# EAGLE board Device_Measurement_V1.2 (EAGLE 6.5.0)
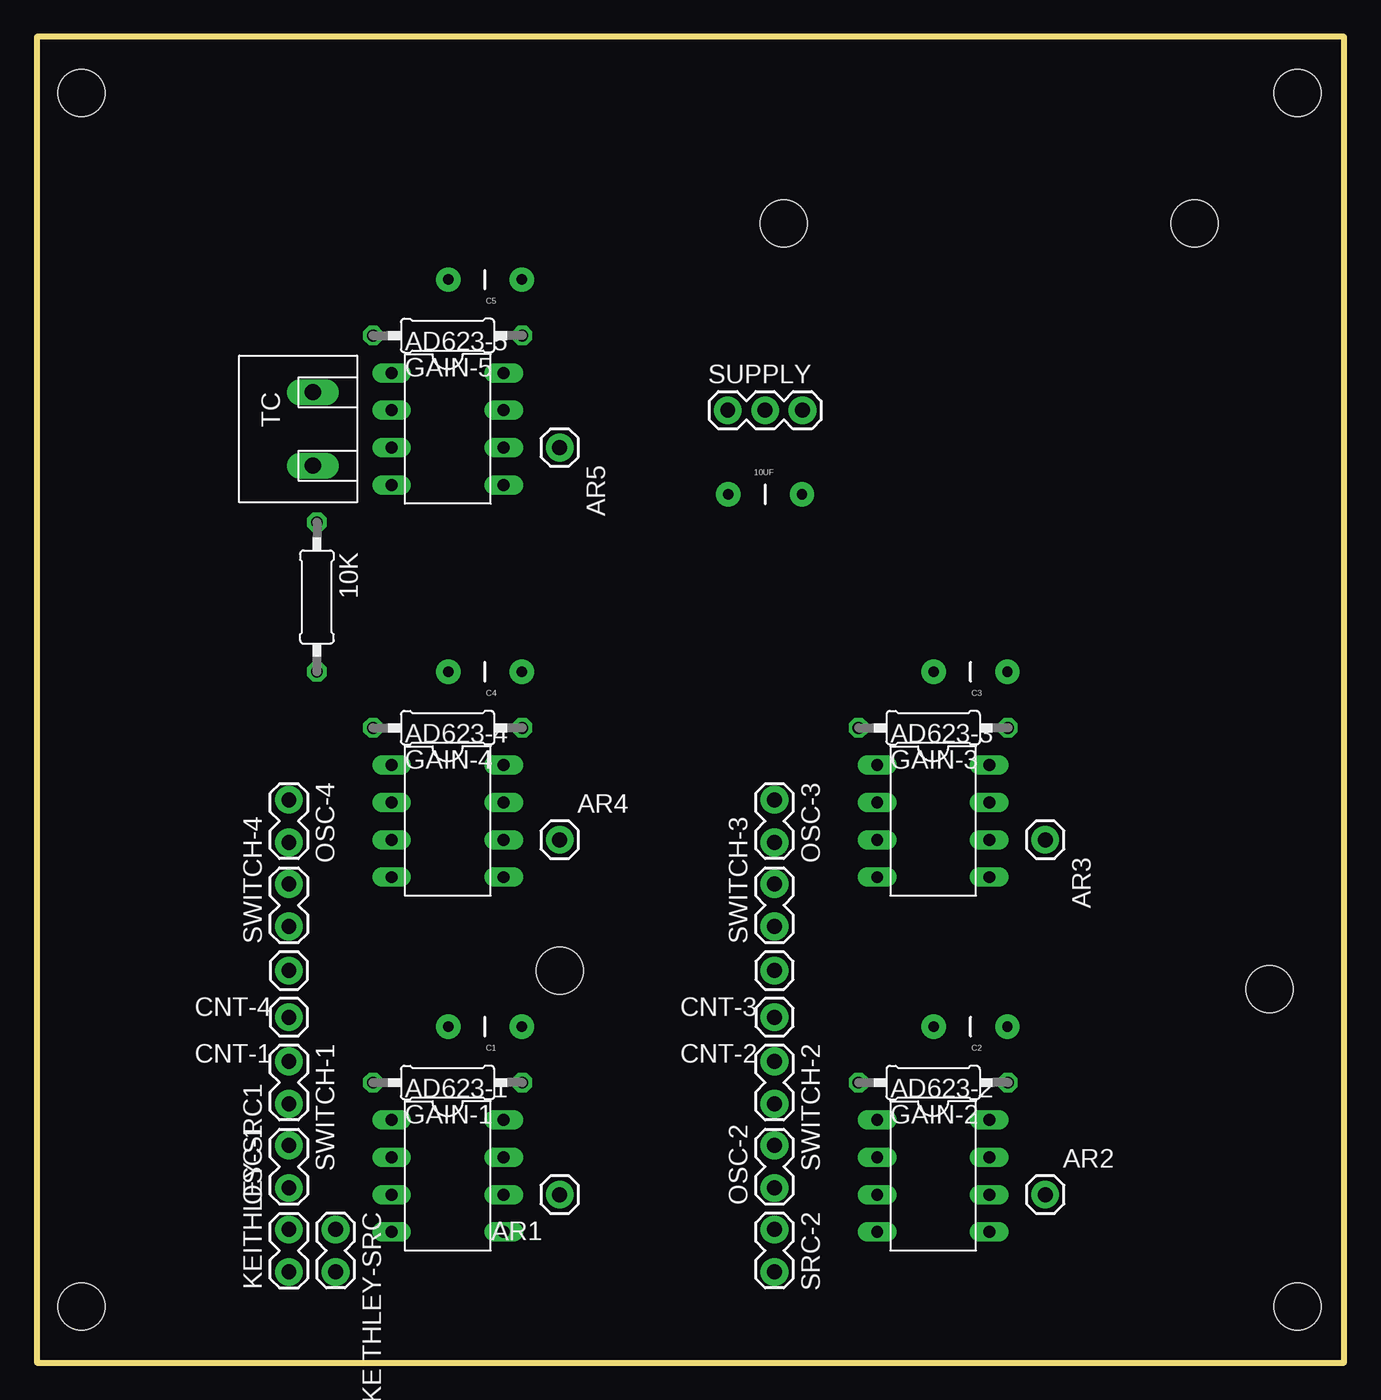
[diagram p0: board, top side]
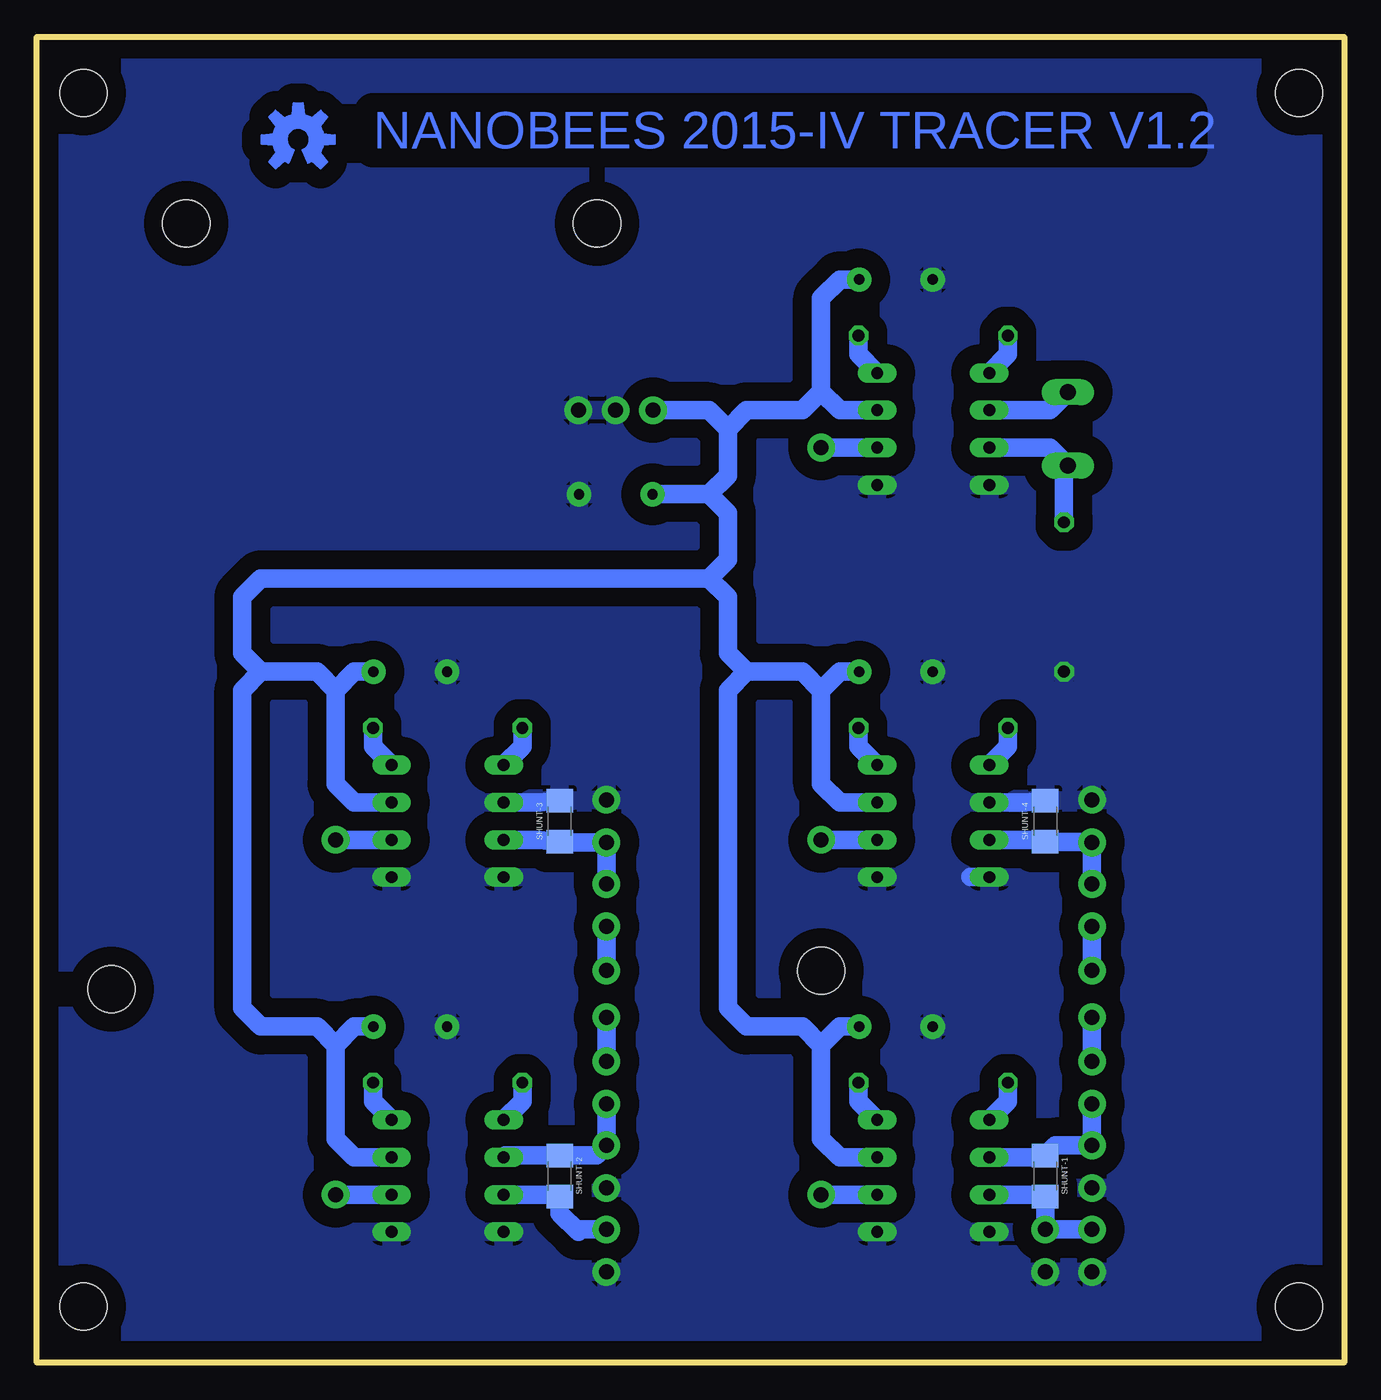
[diagram p1: board, bottom side, seen from below]

Size 88.9 x 90.17 mm. Coordinates in mm from the lower left corner, seen from the top.
Outline: 0,0 88.9,0 88.9,90.17 0,90.17 0,0
Copper layers (1*16): Top 0.035mm / dielectric 1.5mm / Bottom 0.035mm
Design rules "default": minimum track width 10mil, minimum drill 24mil, track to track 8mil, track to pad 8mil, pad to pad 8mil, via to via 8mil, smd to smd 8mil, copper to edge 40mil, drill to drill 8mil, minimum pad ring 10mil, minimum via ring 8mil, stop-mask expansion 4mil, vias tented up to drill 0mil, thermal gap 10mil
Holes 3.2 mm at 3.05,86.36 85.72,86.36 3.05,3.81 85.72,3.81 50.8,77.47 78.74,77.47 83.82,25.4 35.56,26.67

## Footprints (pad centres in the part's own frame; a part is rotated, then mirrored left to right if it is on the bottom)
0207/10 = drill 0.813 octagon: 1 -5.08,0; 2 5.08,0
CAP-PTH-5MM = drill 0.7 pad 1.651: 1 -2.5,0; 2 2.5,0
DIL08 = drill 0.813 long: 1 -3.81,-3.81; 2 -1.27,-3.81; 3 1.27,-3.81; 4 3.81,-3.81; 5 3.81,3.81; 6 1.27,3.81; 7 -1.27,3.81; 8 -3.81,3.81
1X01 = drill 1.016 pad 1.88: 1 0,0
1X02_LOCK = drill 1.016 pad 1.88: 1 -0.178,0; 2 2.718,0
1206 = smd 1.6 x 1.8: 1 -1.4,0; 2 1.4,0
1X03 = drill 1.016 pad 1.88: 1 0,0; 2 2.54,0; 3 5.08,0
M02-NANOBEES = drill 1.1 pad 1.778 long: 1 -2.5,1; 2 2.5,1

## Placement (x,y rotation side)
10K  [0207/10]  19.05,52.07 270 top
10UF  [CAP-PTH-5MM]  49.53,59.05 0 top
AD623-1  AD623N  [DIL08]  27.94,12.7 270 top
AD623-2  AD623N  [DIL08]  60.96,12.7 270 top
AD623-3  AD623N  [DIL08]  60.96,36.83 270 top
AD623-4  AD623N  [DIL08]  27.94,36.83 270 top
AD623-5  AD623N  [DIL08]  27.94,63.5 270 top
AR1  M01PTH  [1X01]  35.56,11.43 180 top
AR2  M01PTH  [1X01]  68.58,11.43 0 top
AR3  M01PTH  [1X01]  68.58,35.56 270 top
AR4  M01PTH  [1X01]  35.56,35.56 0 top
AR5  M01PTH  [1X01]  35.56,62.23 270 top
C1  [CAP-PTH-5MM]  30.48,22.86 180 top
C2  [CAP-PTH-5MM]  63.5,22.86 180 top
C3  [CAP-PTH-5MM]  63.5,46.99 180 top
C4  [CAP-PTH-5MM]  30.48,46.99 180 top
C5  [CAP-PTH-5MM]  30.48,73.66 180 top
CNT-1  M01PTH  [1X01]  17.14,23.5 180 top
CNT-2  M01PTH  [1X01]  50.16,23.5 180 top
CNT-3  M01PTH  [1X01]  50.16,26.67 180 top
CNT-4  M01PTH  [1X01]  17.14,26.67 180 top
GAIN-1  [0207/10]  27.94,19.05 180 top
GAIN-2  [0207/10]  60.96,19.05 180 top
GAIN-3  [0207/10]  60.96,43.18 180 top
GAIN-4  [0207/10]  27.94,43.18 180 top
GAIN-5  [0207/10]  27.94,69.85 180 top
KEITHLEY-SRC  M02LOCK  [1X02_LOCK]  20.32,8.89 270 top
KEITHLEY-SRC1  M02LOCK  [1X02_LOCK]  17.14,6.35 90 top
LOGO1  OSHW-LOGOM  [OSHW-LOGO-M]  71.12,83.19 0 top
OSC-1  M02LOCK  [1X02_LOCK]  17.14,12.06 90 top
OSC-2  M02LOCK  [1X02_LOCK]  50.16,12.06 90 top
OSC-3  M02LOCK  [1X02_LOCK]  50.16,38.1 270 top
OSC-4  M02LOCK  [1X02_LOCK]  17.14,38.1 270 top
SHUNT-1  [1206]  20.32,12.7 270 bottom
SHUNT-2  [1206]  53.34,12.7 270 bottom
SHUNT-3  [1206]  53.34,36.83 90 bottom
SHUNT-4  [1206]  20.32,36.83 90 bottom
SRC-2  M02LOCK  [1X02_LOCK]  50.16,8.89 270 top
SUPPLY  [1X03]  46.99,64.77 0 top
SWITCH-1  M02LOCK  [1X02_LOCK]  17.14,20.32 270 top
SWITCH-2  M02LOCK  [1X02_LOCK]  50.16,20.32 270 top
SWITCH-3  M02LOCK  [1X02_LOCK]  50.16,29.84 90 top
SWITCH-4  M02LOCK  [1X02_LOCK]  17.14,29.84 90 top
TC  M02-NANOBEES  [M02-NANOBEES]  17.78,63.5 270 top

## Library data of the parts
10K GAIN-1-GAIN-5 = resistor
10UF C1-C5 = SparkFun-Capacitors
AD623-1-AD623-5 = analog-devices; MF: ALTERA CORPORATION; MPN: AD623ANZ; OC_FARNELL: 9603700; OC_NEWARK: 59K4402
AR1-AR5 CNT-1-CNT-4 KEITHLEY-SRC KEITHLEY-SRC1 OSC-1-OSC-4 SRC-2 SUPPLY SWITCH-1-SWITCH-4 TC = SparkFun-Connectors
LOGO1 = SparkFun-Aesthetics
SHUNT-1-SHUNT-4 = SparkFun-Resistors

## Nets
5V: 10UF.1 AD623-1.7 AD623-2.7 AD623-3.7 AD623-4.7 AD623-5.7 C1.1 C2.1 C3.1 C4.1 C5.1 SUPPLY.1
GND: 10K.2 10UF.2 AD623-1.4 AD623-1.5 AD623-2.4 AD623-2.5 AD623-3.2 AD623-3.4 AD623-3.5 AD623-4.2 AD623-4.4 AD623-4.5 AD623-5.4 AD623-5.5 C1.2 C2.2 C3.2 C4.2 C5.2 KEITHLEY-SRC1.1 KEITHLEY-SRC.2 OSC-1.1 OSC-2.1 OSC-3.1 OSC-4.1 SHUNT-3.2 SHUNT-4.2 SRC-2.2 SUPPLY.2 SUPPLY.3
N$1: AD623-1.6 AR1.1
N$2: CNT-1.1 SWITCH-1.1
N$3: AD623-2.6 AR2.1
N$4: AD623-1.1 GAIN-1.2
N$5: AD623-4.6 AR4.1
N$6: AD623-1.8 GAIN-1.1
N$7: AD623-3.6 AR3.1
N$8: AD623-2.2 OSC-2.2 SHUNT-2.1 SWITCH-2.2
N$9: AD623-5.6 AR5.1
N$10: AD623-4.3 OSC-4.2 SHUNT-4.1 SWITCH-4.2
N$11: AD623-2.3 SHUNT-2.2 SRC-2.1
N$12: CNT-2.1 SWITCH-2.1
N$13: AD623-2.1 GAIN-2.2
N$14: AD623-2.8 GAIN-2.1
N$15: AD623-3.3 OSC-3.2 SHUNT-3.1 SWITCH-3.2
N$17: 10K.1 AD623-5.3 TC.2
N$18: CNT-4.1 SWITCH-4.1
N$19: CNT-3.1 SWITCH-3.1
N$20: AD623-3.1 GAIN-3.2
N$21: AD623-3.8 GAIN-3.1
N$22: AD623-4.1 GAIN-4.2
N$23: AD623-4.8 GAIN-4.1
N$24: AD623-5.2 TC.1
N$25: AD623-5.1 GAIN-5.2
N$26: AD623-5.8 GAIN-5.1
N$27: AD623-1.2 OSC-1.2 SHUNT-1.1 SWITCH-1.2
N$30: AD623-1.3 KEITHLEY-SRC1.2 KEITHLEY-SRC.1 SHUNT-1.2

## Tracks (layer width: path | path; a pad name or v marks a point on that pad's centre or on a via)
5V
  Bottom 1.27: C1.1 34.29,22.86 35.56,21.59 | 35.56,21.59 35.56,15.24 34.29,13.97 AD623-1.7 | C2.1 67.31,22.86 68.58,21.59 | 68.58,21.59 68.58,15.24 67.31,13.97 AD623-2.7 | C3.1 67.31,46.99 68.58,45.72 | 68.58,45.72 68.58,39.37 67.31,38.1 AD623-3.7 | AD623-4.7 34.29,38.1 35.56,39.37 35.56,45.72 | 35.56,45.72 34.29,46.99 C4.1 | AD623-5.7 34.29,64.77 35.56,66.04 | 35.56,66.04 35.56,72.39 34.29,73.66 C5.1 | 35.56,21.59 36.83,22.86 40.64,22.86 41.91,24.13 41.91,45.72 40.64,46.99 | 40.64,46.99 41.91,48.26 41.91,52.07 43.18,53.34 | 41.91,63.5 40.64,64.77 36.83,64.77 35.56,66.04 | 40.64,46.99 36.83,46.99 35.56,45.72 | 41.91,63.5 43.18,64.77 SUPPLY.1 | 68.58,21.59 69.85,22.86 73.66,22.86 74.93,24.13 74.93,45.72 73.66,46.99 | 73.66,46.99 69.85,46.99 68.58,45.72 | 43.18,53.34 41.91,54.61 41.91,57.78 43.18,59.05 | 43.18,53.34 73.66,53.34 74.93,52.07 74.93,48.26 73.66,46.99 | 41.91,63.5 41.91,60.33 43.18,59.05 | 43.18,59.05 10UF.1
GND
  Bottom 1.27: AD623-3.2 54.74,38.1 SHUNT-3.2 | AD623-4.2 21.72,38.1 SHUNT-4.2 | AD623-4.4 25.4,33.02
  pour Bottom (isolate 1.27): 0,90.17 0,0 88.9,0 88.9,90.17
N$1
  Bottom 1.27: AD623-1.6 AR1.1
N$2
  Bottom 1.27: SWITCH-1.1 CNT-1.1
N$3
  Bottom 1.27: AD623-2.6 AR2.1
N$4
  Bottom 1.27: GAIN-1.2 22.86,17.78 AD623-1.1
N$5
  Bottom 1.27: AD623-4.6 AR4.1
N$6
  Bottom 1.27: GAIN-1.1 33.02,17.78 AD623-1.8
N$7
  Bottom 1.27: AD623-3.6 AR3.1
N$8
  Bottom 1.27: AD623-2.2 57.02,14.1 SHUNT-2.1 50.85,14.1 OSC-2.2 SWITCH-2.2
N$9
  Bottom 1.27: AD623-5.6 AR5.1
N$10
  Bottom 1.27: SWITCH-4.2 OSC-4.2 17.19,35.43 SHUNT-4.1 20.45,35.56 AD623-4.3
N$11
  Bottom 1.27: AD623-2.3 53.47,11.43 SHUNT-2.2 53.34,10.16 52.07,8.89 51.89,9.07 SRC-2.1
N$12
  Bottom 1.27: SWITCH-2.1 CNT-2.1
N$13
  Bottom 1.27: GAIN-2.2 55.88,17.78 AD623-2.1
N$14
  Bottom 1.27: GAIN-2.1 66.04,17.78 AD623-2.8
N$15
  Bottom 1.27: AD623-3.3 54.74,35.56 SHUNT-3.1 53.29,35.38 OSC-3.2 SWITCH-3.2
N$17
  Bottom 1.27: AD623-5.3 20.01,62.23 TC.2 19.05,61 10K.1
N$18
  Bottom 1.27: SWITCH-4.1 CNT-4.1
N$19
  Bottom 1.27: SWITCH-3.1 CNT-3.1
N$20
  Bottom 1.27: GAIN-3.2 55.88,41.91 AD623-3.1
N$21
  Bottom 1.27: GAIN-3.1 66.04,41.91 AD623-3.8
N$22
  Bottom 1.27: GAIN-4.2 22.86,41.91 AD623-4.1
N$23
  Bottom 1.27: GAIN-4.1 33.02,41.91 AD623-4.8
N$24
  Bottom 1.27: AD623-5.2 20.01,64.77 TC.1
N$25
  Bottom 1.27: GAIN-5.2 22.86,68.58 AD623-5.1
N$26
  Bottom 1.27: GAIN-5.1 33.02,68.58 AD623-5.8
N$27
  Bottom 1.27: AD623-1.2 20.45,13.97 SHUNT-1.1 19.64,14.78 OSC-1.2 SWITCH-1.2
N$30
  Bottom 1.27: AD623-1.3 20.45,11.43 SHUNT-1.2 KEITHLEY-SRC.1 KEITHLEY-SRC1.2

## Text on the board
Bottom: NANOBEES 2015-IV TRACER V1.2
Document: Altug Yildirim